# Altium PCB PCB1.PcbDoc
Units mil, origin at the board's own origin, x right, y up, seen from the top; angles counter-clockwise.
Board outline 400 x 525 mil, 2 copper layers (Top Layer, Bottom Layer); 2 components, 5 nets, 10 pads, 0 vias.
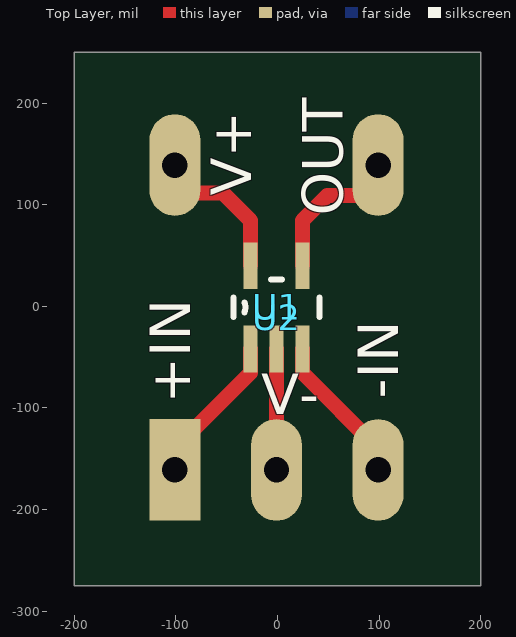
[diagram p0: Top Layer view]
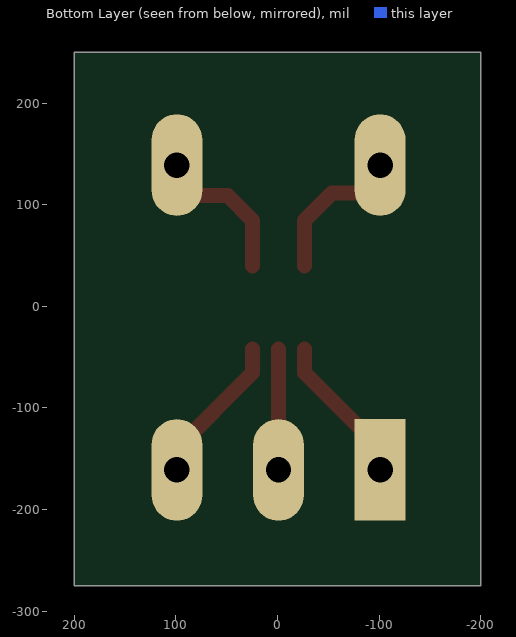
[diagram p1: Bottom Layer view, seen from below]

## Layer stack, top to bottom
Top Solder: solder mask 0.4, Solder Resist, Dk 3.5
Top Layer: signal copper 1.4
Dielectric 1: dielectric 12.6, FR-4, Dk 4.8
Bottom Layer: signal copper 1.4
Bottom Solder: solder mask 0.4, Solder Resist, Dk 3.5

## Board outline
-200,-275 -200,250 200,250 200,-275

## Design rules (kind name [scope] priority, off if disabled: settings)
Clearance [All] p1: gap=10 ignorepadtopadclearanceinfootprint=FALSE except(0: Arc-Hole Track-Hole SMDPad-Hole THPad-Hole Via-Hole Fill-Hole Poly-Hole Region-Hole Text-Hole)
ComponentClearance [All] p1: gap=0 collisioncheckmode=3 verticalgap=10 showdistances=FALSE
PolygonConnect [All] p1: connectstyle=Relief reliefconductorwidth=10 reliefentries=4 polygonreliefangle="90 Angle" airgapwidth=10
RoutingVias [All] p1: holewidth=28 width=50 viastyle="Through Hole" minholewidth=28 minwidth=50 maxholewidth=28 maxwidth=50
SolderMaskExpansion [All] p1: expansion=4 istentingtop=FALSE
Width [All] p1: maxlimit=60 minlimit=10 preferedwidth=40
29 further rules are at their usual default settings.

## Components (designator, comment, footprint, x,y, rotation, side; value= is the part's Value field where it differs from the comment)
U1 "OPA330AIDCKR" DCK5 -1,-1 r90 top
U2 "OPA330AIDCKR_breadboard_conn" OPA330AIDCKR_breadboard_conn -101,-161 r90 top

## Footprints (in the part's own frame and the unit in brackets; to place one, negate y for a bottom-side part, rotate by r counter-clockwise, add the part's x,y. Pads: shape width x height; smd on the part's side, far side on the other; paste and mask are expansions set on the pad)
DCK5 [mil]
  rect 46x14 smd paste-23 mask-23: 1(-41,25.59) 2(-41,0) 3(-41,-25.59) 4(41,-25.59) 5(41,25.59)
  silkscreen extent -9,-42 28,42, body extent -47,-43 47,43, height 43
OPA330AIDCKR_breadboard_conn [mil]
  rect 100x50 hole 25: 1(0,0)
  oval 100x50 hole 25: 2(0,-100) 3(0,-200) 4(300,-200) 5(300,0)

## Part data
U1: "No Description Available", Mfr_Name="Texas Instruments", RefDes=RefDes, Type=Type

## Nets (pads, with @x,y where several pads share a name; then routed paths per layer and width w, separated by ;. In a path a pad name is that pad's centre, name@x,y a point inside that pad or via, vN(x,y) a via of type N, cw(c..) or ccw(c..) an arc to the next point about the centre after c; other vN are vias at no path point)
1: U1.1 U2.1 | length 152.1
  Top Layer w15: U2.1 -101,-136 -83.5,-118.5 -79.68,-118.5 -26.59,-65.41 U1.1
2: U1.2 U2.2 | length 119
  Top Layer w15: U2.2 U1.2
3: U1.3 U2.3 | length 149.8
  Top Layer w15: U1.3 24.59,-65.41 99,-139.82 U2.3
4: U1.4 U2.4 | length 149.6
  Top Layer w15: U1.4 24.59,84.59 49,109 82.83,109 99,125.17 U2.4
5: U1.5 U2.5 | length 148.2
  Top Layer w15: U2.5 -101,127.67 -84.83,111.5 -53.5,111.5 -26.59,84.59 U1.5

## Silkscreen, mask and mechanical layers (free items; w line width, h text height)
Top Overlay:
  text "V+" at -26,109 h40 r90
  text "OUT" at 64,89 h40 r90
  text "-IN" at 119,-91 h40 r90
  text "+IN" at -86,-96 h40 r90
  text "V-" at -16,-106 h40
Board:
  the board outline again, w10